# EAGLE board Pendant (EAGLE 9.6.2)
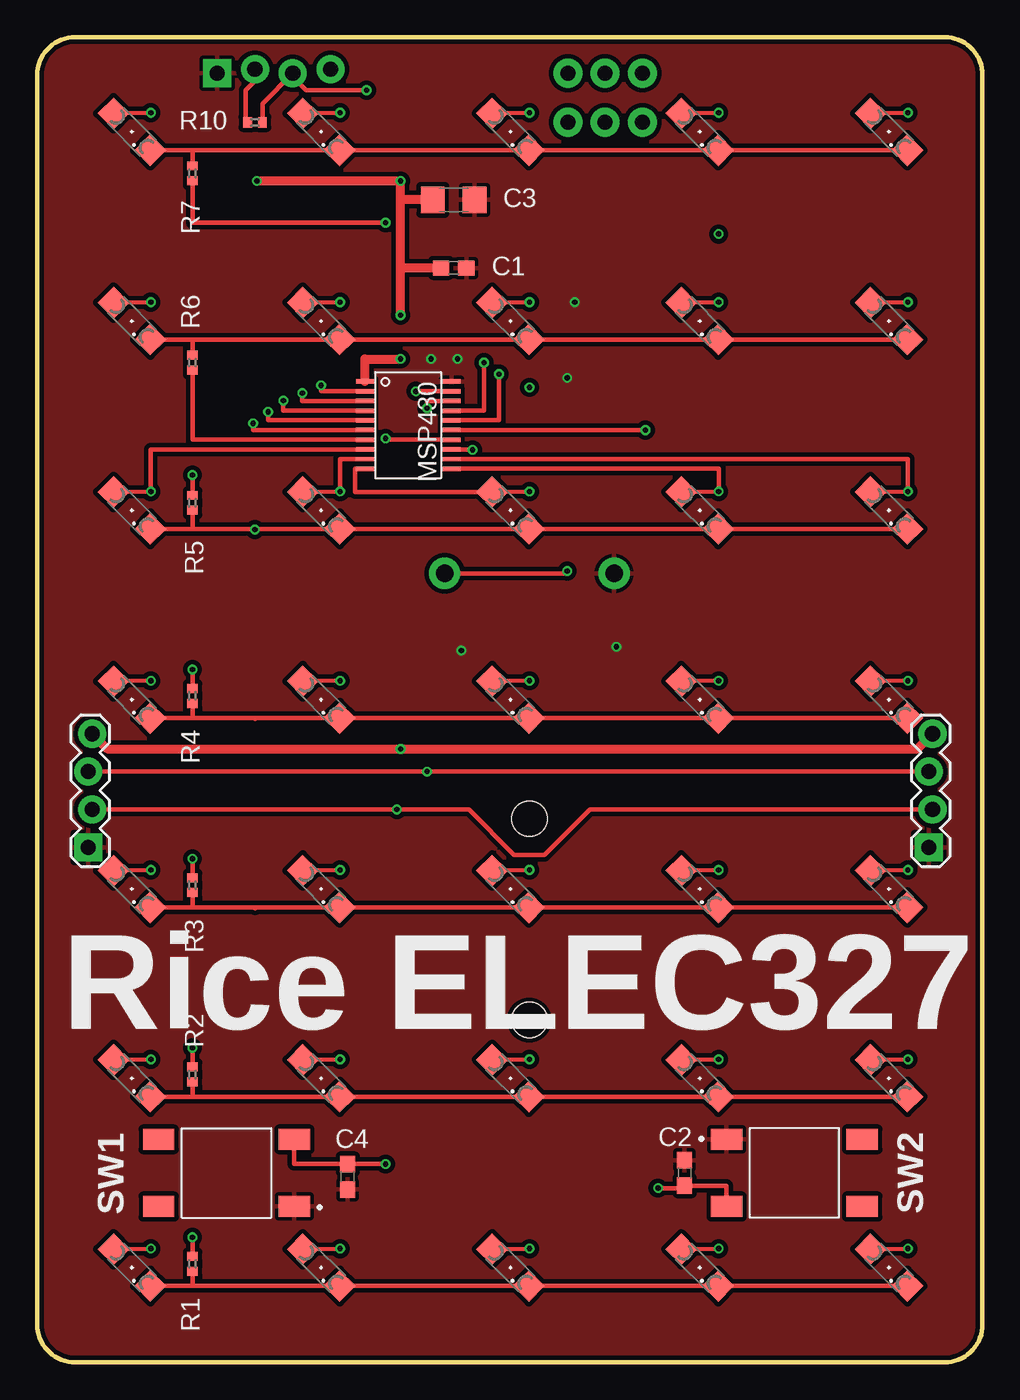
[diagram p0: board, top side]
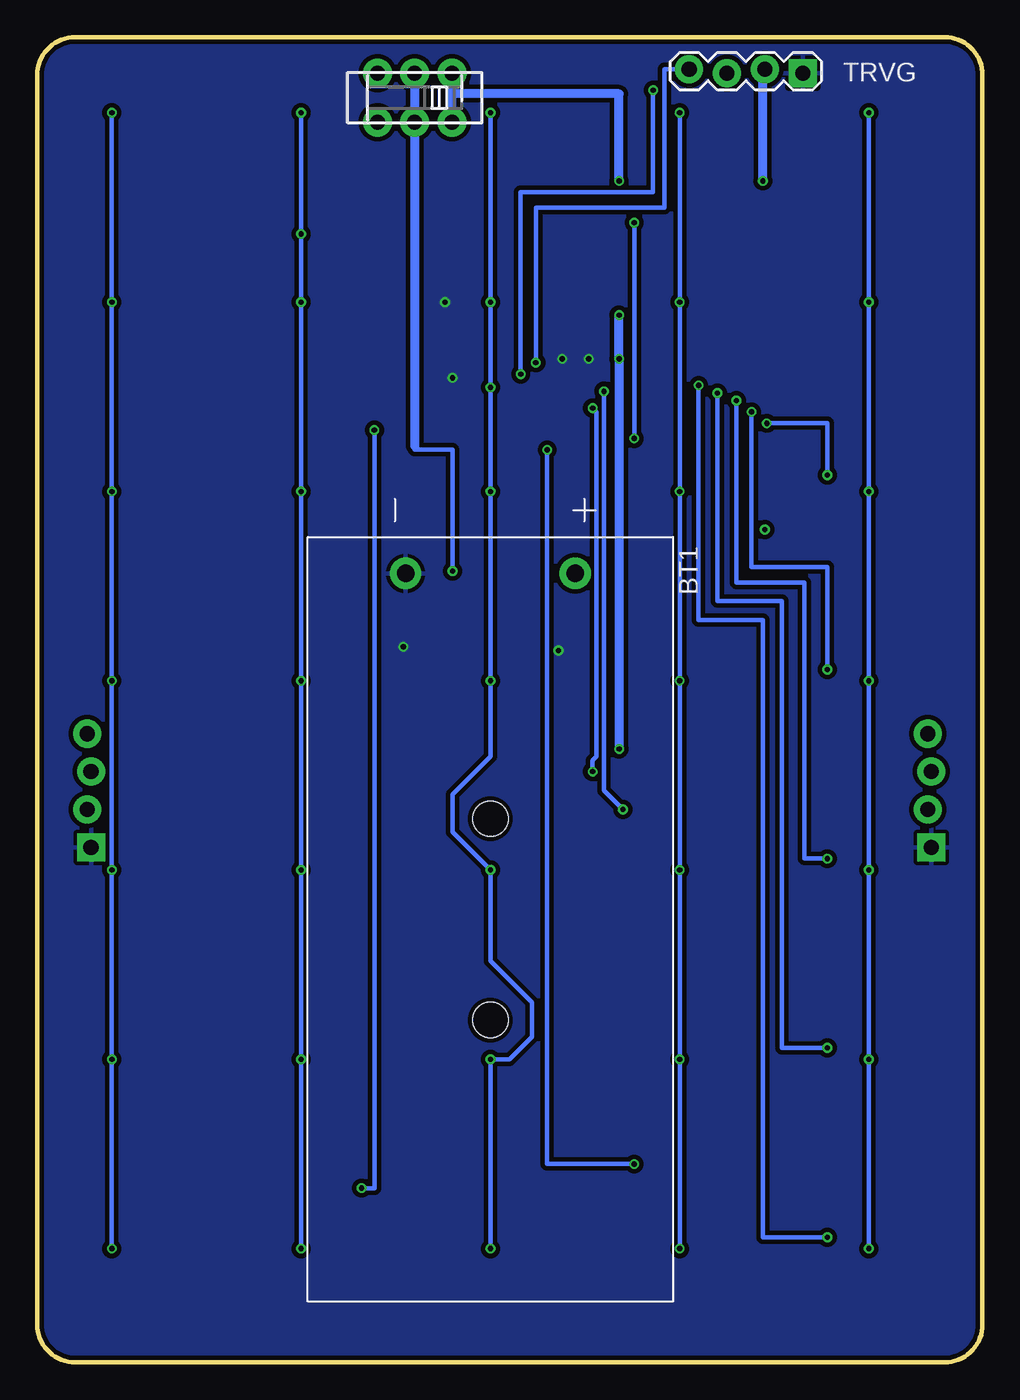
[diagram p1: board, bottom side, seen from below]

Size 63.42 x 88.89 mm. Coordinates in mm from the lower left corner, seen from the top.
Outline: 0,86.35 0,2.54 arc90 2.54,0 60.88,0 arc90 63.42,2.54 63.42,86.35 arc90 60.88,88.89 2.54,88.89 arc90 0,86.35
Copper layers (1*16): Top 0.035mm / dielectric 1.6mm / Bottom 0.035mm
Design rules "jlcpcb-2layers *": minimum track width 5mil, minimum drill 0.3mm, track to track 5mil, track to pad 5mil, pad to pad 5mil, via to via 5mil, smd to smd 5mil, copper to edge 0.2mm, drill to drill 6mil, minimum pad ring 10mil, minimum via ring 6mil, stop-mask expansion 4mil, vias tented up to drill 0mil, thermal gap 10mil

## Footprints (pad centres in the part's own frame; a part is rotated, then mirrored left to right if it is on the bottom)
BAT_BC2AAAPC = drill 1.17: + -23.205,5.69; - -23.205,-5.69 | hole 2.37: 6.755,0; -6.745,0
C0603 = smd 1.1 x 1: 1 -0.85,0; 2 0.85,0
C1206 = smd 1.6 x 1.8: 1 -1.4,0; 2 1.4,0
1X04_LOCK = drill 1.016 pad 1.88 square: 1 0,0.127 | drill 1.016 pad 1.88: 2 2.54,-0.127; 3 5.08,0.127; 4 7.62,-0.127
SML1206 = smd 1.5 x 1.5: A 1.75,0; C -1.75,0
20_PIN = smd 0.3 x 1.2: 1 -2.925,-2.9; 2 -2.275,-2.9; 3 -1.625,-2.9; 4 -0.975,-2.9; 5 -0.325,-2.9; 6 0.325,-2.9; 7 0.975,-2.9; 8 1.625,-2.9; 9 2.275,-2.9; 10 2.925,-2.9; 11 2.925,2.9; 12 2.275,2.9; 13 1.625,2.9; 14 0.975,2.9; 15 0.325,2.9; 16 -0.325,2.9; 17 -0.975,2.9; 18 -1.625,2.9; 19 -2.275,2.9; 20 -2.925,2.9
R0402 = smd 0.6 x 0.7: 1 -0.5,0; 2 0.5,0
SW_1571563-4 = smd 2.1 x 1.4: 1 -4.55,2.25; 2 4.55,2.25; 3 -4.55,-2.25; 4 4.55,-2.25
JS_DPDT_TH = drill 1 pad 1.93: 1 -2.5,-1.65; 2 0,-1.65; 3 2.5,-1.65; 4 -2.5,1.65; 5 0,1.65; 6 2.5,1.65

## Placement (x,y rotation side)
BT1  BC2AAAPC  [BAT_BC2AAAPC]  33.02,29.72 270 bottom
C1  1u  [C0603]  27.94,73.41 0 top
C2  47nF  [C0603]  43.43,12.7 270 top
C3  100u  [C1206]  27.94,77.98 0 top
C4  47nF  [C0603]  20.83,12.45 90 top
JP2  [1X04_LOCK]  3.56,34.54 90 top
JP3  [1X04_LOCK]  59.94,34.54 90 top
LED1  [SML1206]  6.35,6.35 135 top
LED2  [SML1206]  6.35,19.05 135 top
LED3  [SML1206]  6.35,31.75 135 top
LED4  [SML1206]  6.35,44.45 135 top
LED5  [SML1206]  6.35,57.15 135 top
LED6  [SML1206]  6.35,69.85 135 top
LED7  [SML1206]  6.35,82.55 135 top
LED8  [SML1206]  19.05,6.35 135 top
LED9  [SML1206]  19.05,19.05 135 top
LED10  [SML1206]  19.05,31.75 135 top
LED11  [SML1206]  19.05,44.45 135 top
LED12  [SML1206]  19.05,57.15 135 top
LED13  [SML1206]  19.05,69.85 135 top
LED14  [SML1206]  19.05,82.55 135 top
LED15  [SML1206]  31.75,6.35 135 top
LED16  [SML1206]  31.75,19.05 135 top
LED17  [SML1206]  31.75,31.75 135 top
LED18  [SML1206]  31.75,44.45 135 top
LED19  [SML1206]  31.75,57.15 135 top
LED20  [SML1206]  31.75,69.85 135 top
LED21  [SML1206]  31.75,82.55 135 top
LED22  [SML1206]  44.45,6.35 135 top
LED23  [SML1206]  44.45,19.05 135 top
LED24  [SML1206]  44.45,31.75 135 top
LED25  [SML1206]  44.45,44.45 135 top
LED26  [SML1206]  44.45,57.15 135 top
LED27  [SML1206]  44.45,69.85 135 top
LED28  [SML1206]  44.45,82.55 135 top
LED29  [SML1206]  57.15,6.35 135 top
LED30  [SML1206]  57.15,19.05 135 top
LED31  [SML1206]  57.15,31.75 135 top
LED32  [SML1206]  57.15,44.45 135 top
LED33  [SML1206]  57.15,57.15 135 top
LED34  [SML1206]  57.15,69.85 135 top
LED35  [SML1206]  57.15,82.55 135 top
MSP430  MSP  [20_PIN]  24.89,62.87 270 top
R1  [R0402]  10.41,6.6 270 top
R2  [R0402]  10.41,19.3 270 top
R3  [R0402]  10.41,32 270 top
R4  [R0402]  10.41,44.7 270 top
R5  [R0402]  10.41,57.66 270 top
R6  [R0402]  10.41,67.06 90 top
R7  [R0402]  10.41,79.76 90 top
R10  [R0402]  14.61,83.19 0 top
SW1  SWITCH_SPSTSMD  [SW_1571563-4]  12.7,12.7 180 top
SW2  SWITCH_SPSTSMD  [SW_1571563-4]  50.8,12.7 0 top
TRVG  [1X04_LOCK]  12.06,86.61 180 bottom
U$1  SWITCH_DPDT  [JS_DPDT_TH]  38.1,84.84 180 bottom

## Library data of the parts
BT1 = BC2AAAPC; DESCRIPTION: BATTERY HOLDER AAA 2 CELL PC PIN; DIGI-KEY_PART_NUMBER: BC2AAAPC-ND; MF: MPD; MP: BC2AAAPC; PACKAGE: None; PURCHASE-URL: https://pricing.snapeda.com/search/part/BC2AAAPC/?ref=eda
C1-C4 = rcl; SPICEPREFIX: C
JP2 JP3 TRVG = Pendant
LED1-LED35 = led
MSP430 = RatDBS
R1-R7 R10 = rcl; SPICEPREFIX: R
SW1 SW2 U$1 = ELEC327

## Nets
_RST: MSP430.16 R10.2 TRVG.3
COL1: LED1.A LED2.A LED3.A LED4.A LED5.A LED6.A LED7.A MSP430.8
COL2: LED8.A LED9.A LED10.A LED11.A LED12.A LED13.A LED14.A MSP430.9
COL3: LED15.A LED16.A LED17.A LED18.A LED19.A LED20.A LED21.A MSP430.10
COL4: LED22.A LED23.A LED24.A LED25.A LED26.A LED27.A LED28.A MSP430.11
COL5: LED29.A LED30.A LED31.A LED32.A LED33.A LED34.A LED35.A MSP430.12
GND: BT1.- C1.2 C2.1 C3.2 C4.1 JP2.1 JP3.1 MSP430.20 SW1.1 SW2.1 TRVG.1
N$1: MSP430.14 R7.1
N$2: BT1.+ U$1.2 U$1.5
N$3: MSP430.2 R1.1
N$4: MSP430.3 R2.1
N$5: MSP430.4 R3.1
N$6: MSP430.5 R4.1
N$7: MSP430.6 R5.1
N$8: MSP430.7 R6.1
ROW1: LED1.C LED8.C LED15.C LED22.C LED29.C R1.2
ROW2: LED2.C LED9.C LED16.C LED23.C LED30.C R2.2
ROW3: LED3.C LED10.C LED17.C LED24.C LED31.C R3.2
ROW4: LED4.C LED11.C LED18.C LED25.C LED32.C R4.2
ROW5: LED5.C LED12.C LED19.C LED26.C LED33.C R5.2
ROW6: LED6.C LED13.C LED20.C LED27.C LED34.C R6.2
ROW7: LED7.C LED14.C LED21.C LED28.C LED35.C R7.2
SIG1: JP2.2 JP3.2 MSP430.19
SIG2: JP2.3 JP3.3 MSP430.18
SWITCH1: C4.2 MSP430.13 SW1.3
SWITCH2: C2.2 MSP430.15 SW2.3
TEST: MSP430.17 TRVG.4
VDD: C1.1 C3.1 JP2.4 JP3.4 MSP430.1 R10.1 TRVG.2 U$1.1 U$1.4

## Tracks (layer width: path | path; a pad name or v marks a point on that pad's centre or on a via)
_RST  (via drill 0.35)
  Top 0.305: v30.99,66.29 30.99,63.19 MSP430.16 | v22.1,85.34 18.03,85.34 17.14,86.23 TRVG.3 15.11,84.45 R10.2
  Bottom 0.305: v30.99,66.29 30.99,78.49 22.1,78.49 v22.1,85.34
COL1  (via drill 0.35)
  Top 0.305: LED7.A v7.62,83.82 | LED6.A v7.62,71.12 | LED5.A v7.62,58.42 7.62,61.24 MSP430.8 | LED4.A v7.62,45.72 | LED3.A v7.62,33.02 | LED2.A v7.62,20.32 | LED1.A v7.62,7.62
  Bottom 0.305: v7.62,83.82 v7.62,71.12 v7.62,58.42 v7.62,45.72 v7.62,33.02 v7.62,20.32 v7.62,7.62
COL2  (via drill 0.35)
  Top 0.305: LED14.A v20.32,83.82 | LED13.A v20.32,71.12 | LED12.A v20.32,58.42 20.32,60.59 MSP430.9 | LED11.A v20.32,45.72 | LED10.A v20.32,33.02 | LED9.A v20.32,20.32 | LED8.A v20.32,7.62
  Bottom 0.305: v20.32,7.62 v20.32,20.32 v20.32,33.02 v20.32,45.72 v20.32,58.42 v20.32,71.12 v20.32,83.82
COL3  (via drill 0.35)
  Top 0.305: LED21.A v33.02,83.82 | LED20.A v33.02,71.12 | v33.02,58.42 LED19.A 21.34,58.39 21.34,59.94 MSP430.10 | LED18.A v33.02,45.72 | LED17.A v33.02,33.02 | LED16.A v33.02,20.32 | LED15.A v33.02,7.62
  Bottom 0.305: v33.02,83.82 v33.02,71.12 v33.02,65.41 v33.02,58.42 v33.02,45.72 33.02,40.64 35.56,38.1 35.56,35.56 v33.02,33.02 33.02,26.92 30.23,24.13 30.23,21.84 31.75,20.32 v33.02,20.32 v33.02,7.62
COL4  (via drill 0.35)
  Top 0.305: LED26.A v45.72,58.42 45.72,59.94 MSP430.11 | LED27.A v45.72,71.12 | LED28.A v45.72,83.82 | LED25.A v45.72,45.72 | LED24.A v45.72,33.02 | LED23.A v45.72,20.32 | LED22.A v45.72,7.62
  Bottom 0.305: v45.72,7.62 v45.72,20.32 v45.72,33.02 v45.72,45.72 v45.72,58.42 v45.72,71.12 v45.72,75.69 v45.72,83.82
COL5  (via drill 0.35)
  Top 0.305: LED35.A v58.42,83.82 | LED34.A v58.42,71.12 | LED33.A v58.42,58.42 58.42,60.59 MSP430.12 | LED32.A v58.42,45.72 | LED31.A v58.42,33.02 | LED30.A v58.42,20.32 | LED29.A v58.42,7.62
  Bottom 0.305: v58.42,83.82 58.42,73.66 v58.42,71.12 v58.42,58.42 v58.42,45.72 v58.42,33.02 v58.42,20.32 v58.42,7.62
GND  (via drill 0.35)
  other vias: 38.86,48.01 28.45,47.75 35.56,66.04 36.07,71.12 26.42,67.31 28.19,67.31
  pour Bottom (isolate 0.305): 0,88.9 63.5,88.9 63.5,0 0,0
  pour Top (isolate 0.305): 0,88.9 0,0 63.5,0 63.5,88.9
N$1  (via drill 0.35)
  Top 0.305: MSP430.14 23.37,61.89 v23.37,61.98 | R7.1 10.41,76.45 v23.37,76.45
  Bottom 0.305: v23.37,61.98 v23.37,76.45
N$2  (via drill 0.35)
  Top 0.305: BT1.+ 35.56,52.92 v35.56,53.09
  Bottom 0.305: 38.1,61.47 38.1,61.21 35.56,61.21 v35.56,53.09
  Bottom 0.61: U$1.2 U$1.5 38.1,61.47
N$3  (via drill 0.35)
  Top 0.305: MSP430.2 19.05,65.14 v19.05,65.53 | v10.41,8.38 R1.1
  Bottom 0.305: v19.05,65.53 19.05,49.78 14.73,49.78 14.73,8.38 v10.41,8.38
N$4  (via drill 0.35)
  Top 0.305: MSP430.3 17.78,64.49 v17.78,65.02 | v10.41,21.08 R2.1
  Bottom 0.305: v17.78,65.02 17.78,51.05 13.46,51.05 13.46,21.08 v10.41,21.08
N$5  (via drill 0.35)
  Top 0.305: MSP430.4 16.51,63.84 v16.51,64.52 | v10.41,33.78 R3.1
  Bottom 0.305: v16.51,64.52 16.51,52.32 11.94,52.32 11.94,33.78 v10.41,33.78
N$6  (via drill 0.35)
  Top 0.305: MSP430.5 15.49,63.19 v15.49,63.75 | v10.41,46.48 R4.1
  Bottom 0.305: v15.49,63.75 15.49,53.34 10.41,53.34 v10.41,46.48
N$7  (via drill 0.35)
  Top 0.305: MSP430.6 14.48,62.54 v14.48,62.99 | R5.1 v10.41,59.52
  Bottom 0.305: v10.41,59.52 10.41,62.99 v14.48,62.99
N$8
  Top 0.305: R6.1 10.41,61.89 MSP430.7
ROW1
  Top 0.305: LED29.C LED22.C LED15.C LED8.C 10.41,5.11 | 10.41,5.11 LED1.C | R1.2 10.41,5.11
ROW2
  Top 0.305: LED2.C 10.41,17.81 | LED30.C LED23.C LED16.C LED9.C 10.41,17.81 | R2.2 10.41,17.81
ROW3
  Top 0.305: LED31.C LED24.C LED17.C LED10.C 14.61,30.51 14.61,30.46 14.6,30.51 10.41,30.51 | 10.41,30.51 LED3.C | R3.2 10.41,30.51
ROW4
  Top 0.305: LED4.C 10.41,43.21 | 10.41,43.21 14.6,43.21 14.61,43.16 14.61,43.21 LED11.C LED18.C LED25.C LED32.C | R4.2 10.41,43.21
ROW5  (via drill 0.35)
  Top 0.305: LED5.C 10.16,55.91 10.41,55.91 | 10.41,55.91 14.6,55.91 v14.61,55.86 14.61,55.91 LED12.C LED19.C LED26.C LED33.C | R5.2 10.41,55.91
ROW6
  Top 0.305: LED34.C LED27.C LED20.C LED13.C LED6.C 10.41,68.61 R6.2
ROW7
  Top 0.305: 10.41,81.31 LED14.C LED21.C LED28.C LED35.C | R7.2 10.41,81.31 | LED7.C 10.41,81.31
SIG1  (via drill 0.35)
  Top 0.305: JP2.2 v24.13,37.08 28.96,37.08 32,34.04 34.04,34.04 37.08,37.08 JP3.2 | MSP430.19 v25.4,65.14
  Bottom 0.305: v25.4,65.14 25.4,38.35 v24.13,37.08
SIG2  (via drill 0.35)
  Top 0.305: JP3.3 v26.16,39.62 JP2.3 | MSP430.18 26.16,64.49 v26.16,64.01
  Bottom 0.305: v26.16,64.01 25.91,63.75 25.91,40.64 26.16,40.39 v26.16,39.62
SWITCH1  (via drill 0.35)
  Top 0.305: MSP430.13 29.21,61.24 v29.21,61.21 | SW1.3 17.25,13.3 C4.2 v23.37,13.3
  Bottom 0.305: v29.21,61.21 29.21,13.3 v23.37,13.3
SWITCH2  (via drill 0.35)
  Top 0.305: MSP430.15 v40.8,62.54 | v41.66,11.68 43.43,11.68 C2.2 46.25,11.85 SW2.3
  Bottom 0.305: v40.8,62.54 40.8,11.68 v41.66,11.68
TEST  (via drill 0.35)
  Top 0.305: MSP430.17 29.97,63.84 v29.97,67.06
  Bottom 0.305: v29.97,67.06 29.97,77.47 21.34,77.47 21.34,86.74 TRVG.4
VDD  (via drill 0.35)
  Top 0.305: TRVG.2 14.61,85.98 13.97,85.34 13.97,83.32 R10.1
  Top 0.61: JP2.4 4.7,41.15 v24.38,41.15 59.05,41.15 JP3.4 | v24.38,70.25 24.38,73.41 | 24.38,73.41 24.38,77.98 | 24.38,77.98 v24.38,79.25 v14.73,79.25 | C3.1 24.38,77.98 | C1.1 24.38,73.41 | MSP430.1 21.99,67.31 v24.38,67.31
  Bottom 0.61: 35.6,85.09 24.38,85.09 v24.38,79.25 | 35.6,85.09 U$1.1 | U$1.4 35.6,85.09 | v24.38,70.25 v24.38,67.31 v24.38,41.15 | v14.73,79.25 14.73,86.61 TRVG.2

## Text on the board
tPlace: Rice ELEC327